# Altium PCB CAN_PDM.PcbDoc
Units mm, origin at the board's own origin, x right, y up, seen from the top; angles counter-clockwise.
Board outline 90 x 100 mm, 4 copper layers (Top Layer, Int1(GND), Int2 (PWR+SIGN), Bottom Layer), stack 1.61 mm thick; 287 components, 204 nets, 885 pads, 0 vias.
Unrouted connection lines stored in the file: 583.
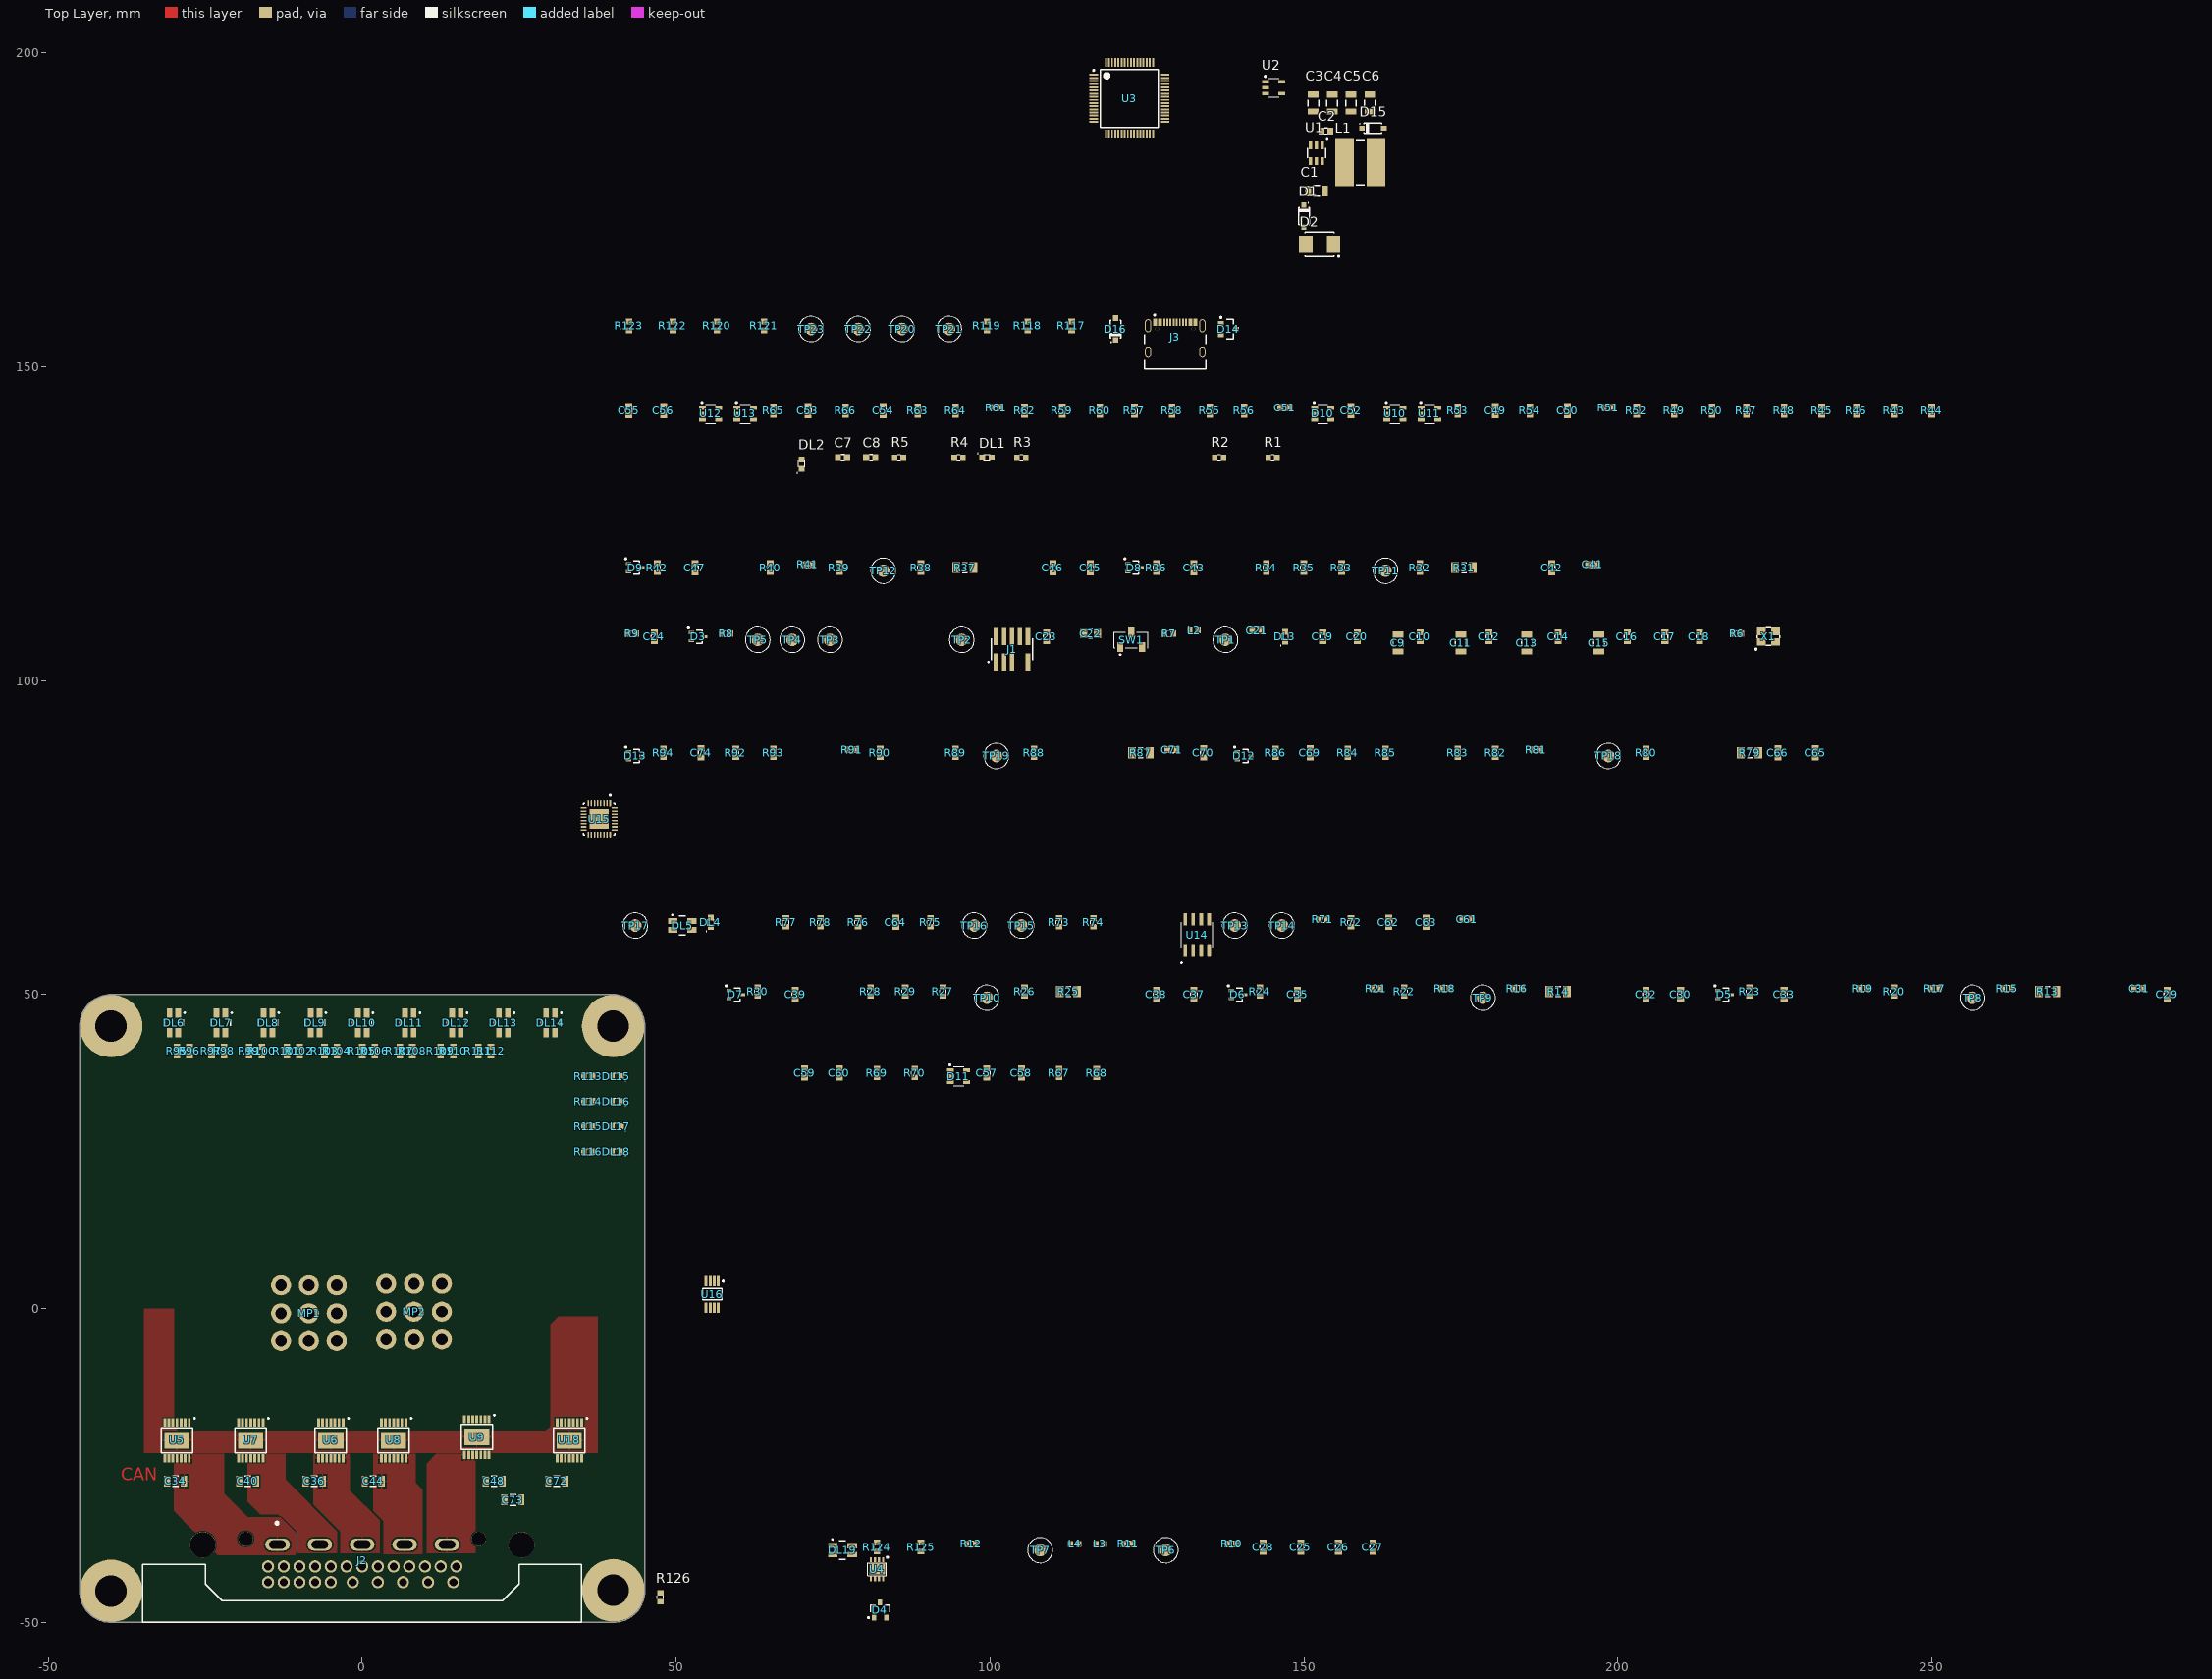
[diagram p0: Top Layer view]
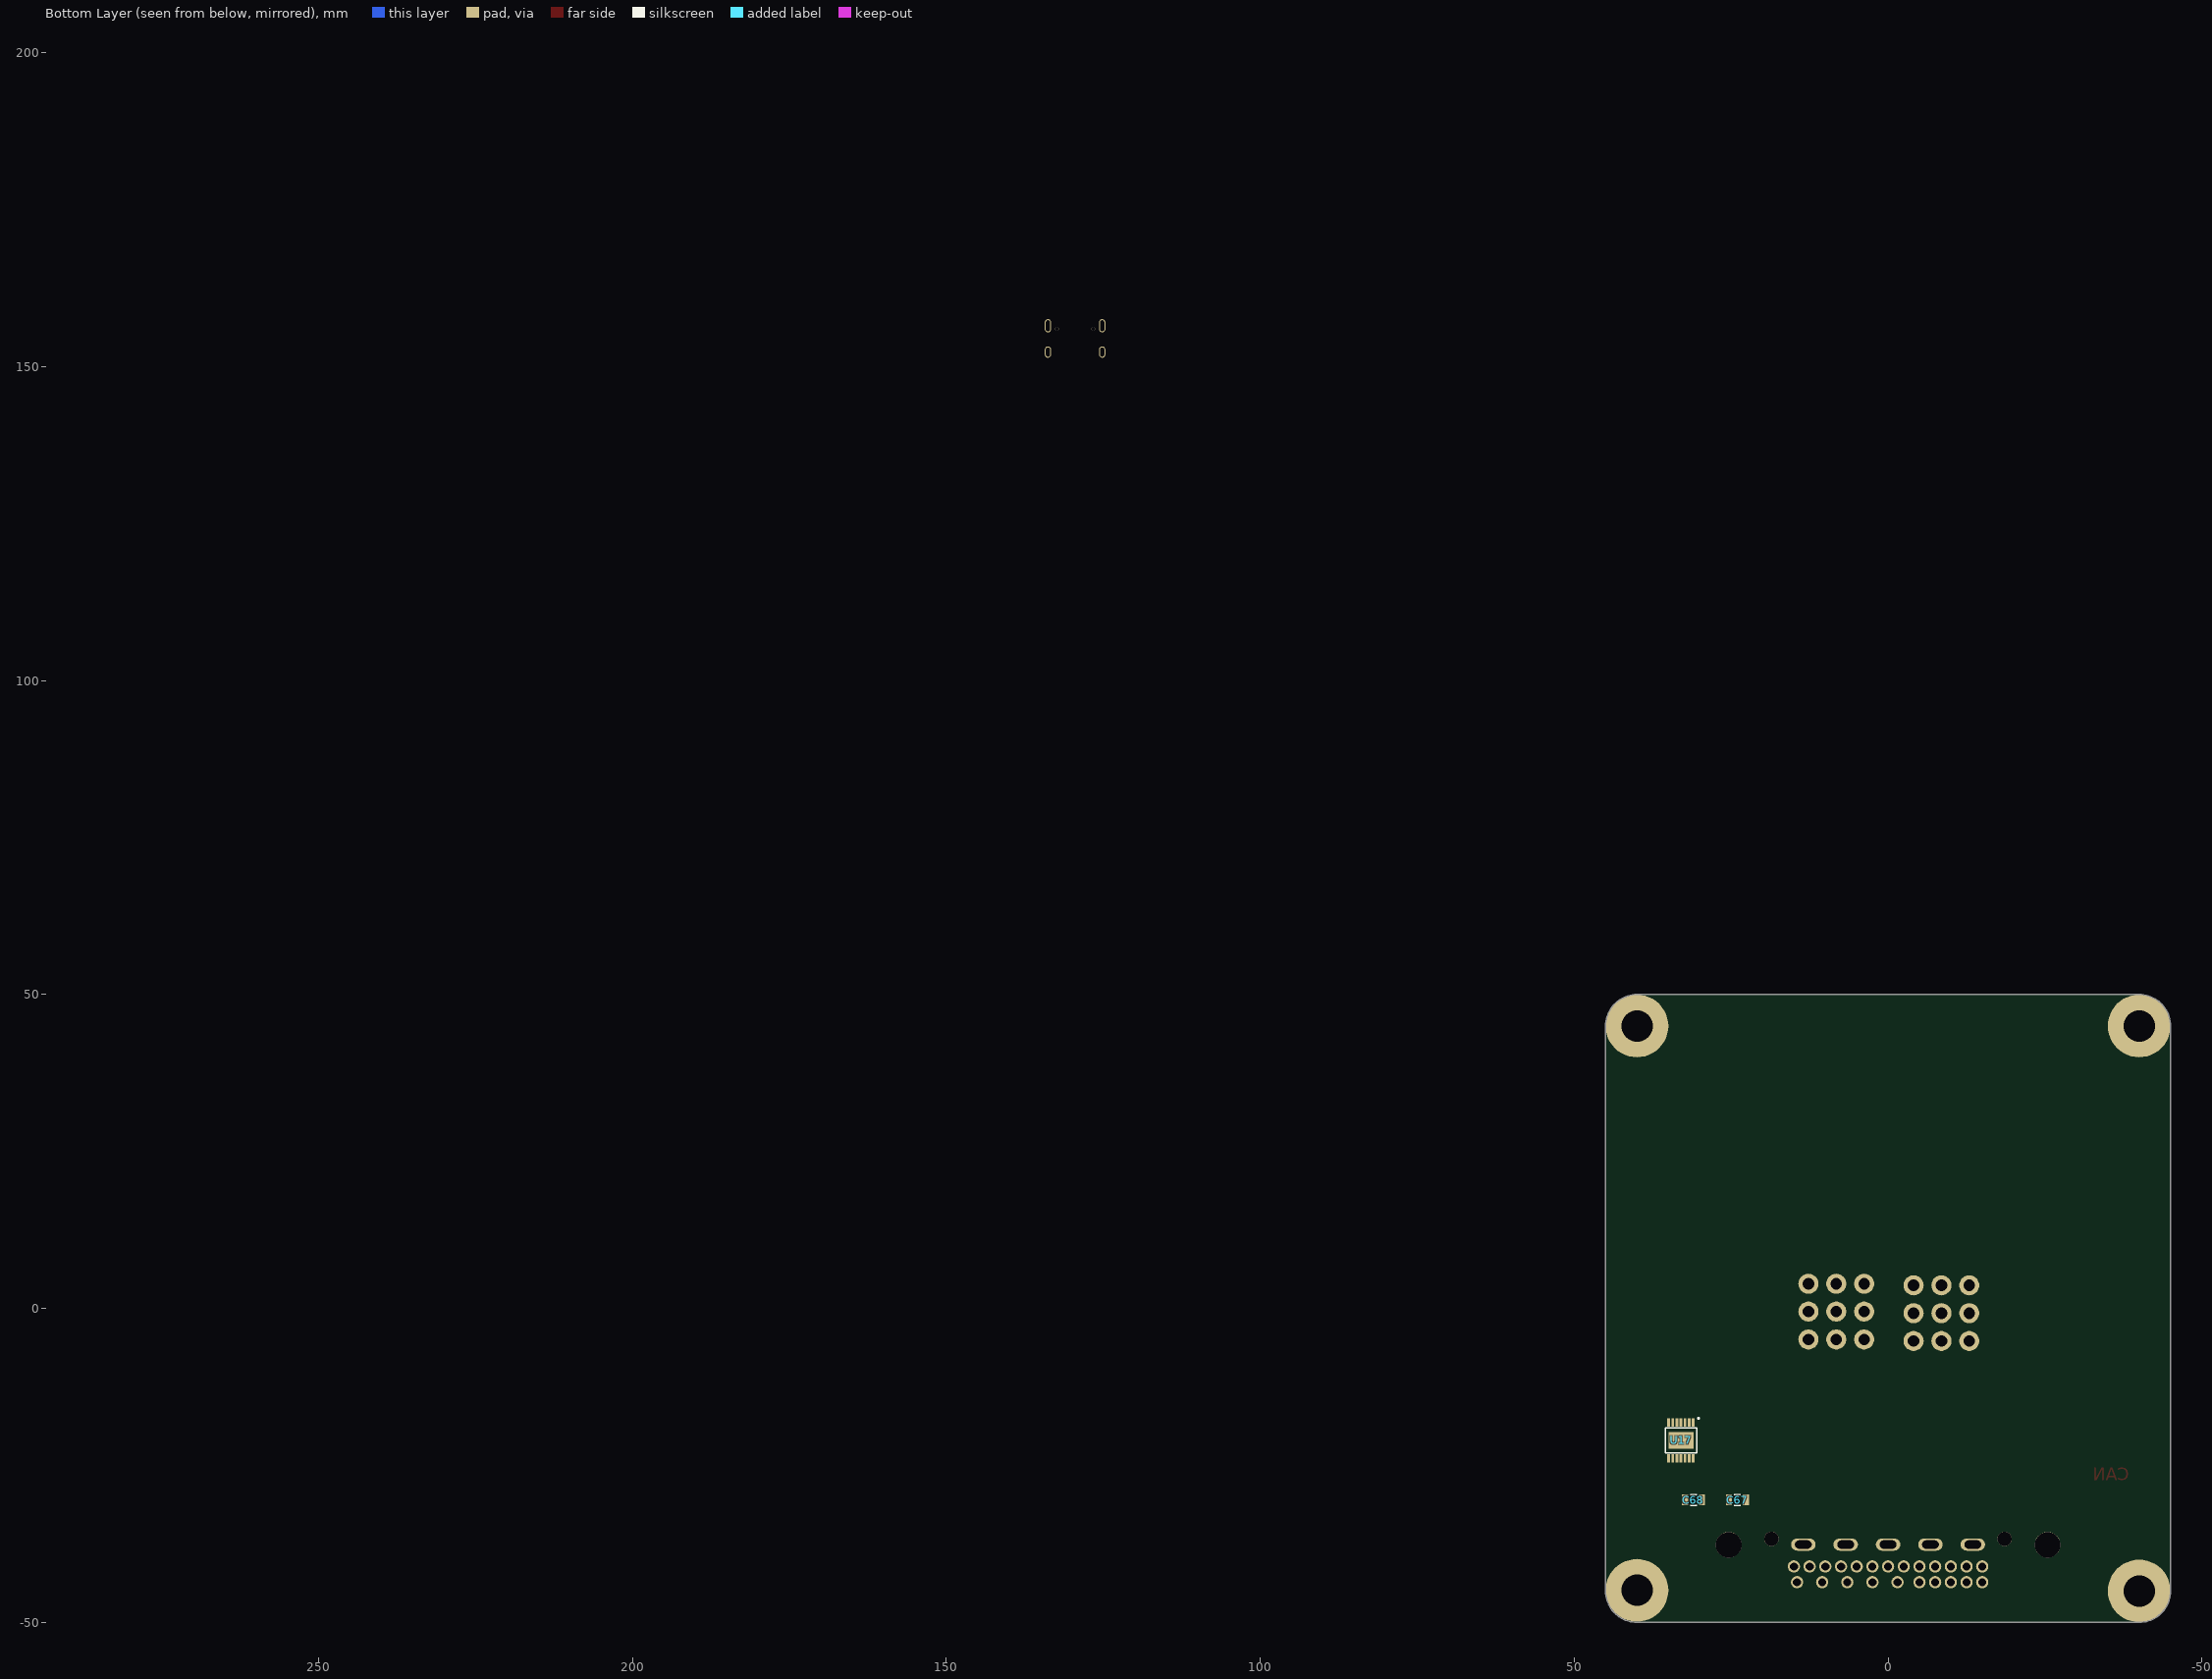
[diagram p1: Bottom Layer view, seen from below]

## Layer stack, top to bottom
Top Solder: solder mask 0.0254, SM-001, Dk 4
Top Layer: signal copper 0.07
Dielectric 1: prepreg 0.1, PP-006, Dk 4.3
Dielectric 2: prepreg 0.1, PP-006, Dk 4.3
Int1(GND): signal copper 0.035
Dielectric 3: core 0.5, Core-035, Dk 4.3
Dielectric 6: core 0.5, Core-035, Dk 4.3
Int2 (PWR+SIGN): signal copper 0.035
Dielectric 7: prepreg 0.1, PP-006, Dk 4.3
Dielectric 8: prepreg 0.1, PP-006, Dk 4.3
Bottom Layer: signal copper 0.07
Bottom Solder: solder mask 0.0254, SM-001, Dk 4

## Board outline
-45,-45 -45,45 cw(c-40,45) -40,50 40,50 cw(c40,45) 45,45 45,-45 cw(c40,-45) 40,-50 -40,-50 cw(c-40,-45)

## Design rules (kind name [scope] priority, off if disabled: settings)
Clearance [All] p1: gap=0.2 ignorepadtopadclearanceinfootprint=FALSE
DiffPairsRouting DIFF_USB [InDifferentialPair('MCU_USBD')] p1: maxlimit=0.127 minlimit=0.127 mostfreqgap=0.127 toplayer_minwidth=0.155 toplayer_maxwidth=0.155 toplayer_prefwidth=0.155 midlayer1_minwidth=0.113 midlayer1_maxwidth=0.113 midlayer1_prefwidth=0.113 midlayer2_minwidth=0.113 midlayer2_maxwidth=0.113 midlayer2_prefwidth=0.113 bottomlayer_minwidth=0.155 bottomlayer_maxwidth=0.155 bottomlayer_prefwidth=0.155 impedanceprofiledriven=TRUE impedanceprofileid={4725E992-7F78-4913-8093-96E97FDBBCEB} impedanceprofilevalue=90.000000 maxuncoupledlength=12.7
DiffPairsRouting DIFF_CAN [InDifferentialPair('CAN')] p2: maxlimit=0.4 minlimit=0.127 mostfreqgap=0.4 toplayer_mingap=0.4 toplayer_minwidth=0.162 toplayer_maxwidth=0.162 toplayer_prefwidth=0.162 midlayer1_maxgap=0.127 midlayer1_prefgap=0.127 midlayer1_minwidth=0.029 midlayer1_maxwidth=0.029 midlayer1_prefwidth=0.029 midlayer2_maxgap=0.127 midlayer2_prefgap=0.127 midlayer2_minwidth=0.029 midlayer2_maxwidth=0.029 midlayer2_prefwidth=0.029 bottomlayer_mingap=0.4 bottomlayer_minwidth=0.162 bottomlayer_maxwidth=0.162 bottomlayer_prefwidth=0.162 impedanceprofiledriven=TRUE impedanceprofileid={24A1E0E4-F791-4F9D-94C0-74FD7069D479} impedanceprofilevalue=120.000000 maxuncoupledlength=12.7
DiffPairsRouting DIFF_CAN_1 [InDifferentialPair('CAN0_IC')] p3: maxlimit=0.4 minlimit=0.127 mostfreqgap=0.4 toplayer_mingap=0.4 toplayer_minwidth=0.162 toplayer_maxwidth=0.162 toplayer_prefwidth=0.162 midlayer1_maxgap=0.127 midlayer1_prefgap=0.127 midlayer1_minwidth=0.029 midlayer1_maxwidth=0.029 midlayer1_prefwidth=0.029 midlayer2_maxgap=0.127 midlayer2_prefgap=0.127 midlayer2_minwidth=0.029 midlayer2_maxwidth=0.029 midlayer2_prefwidth=0.029 bottomlayer_mingap=0.4 bottomlayer_minwidth=0.162 bottomlayer_maxwidth=0.162 bottomlayer_prefwidth=0.162 impedanceprofiledriven=TRUE impedanceprofileid={24A1E0E4-F791-4F9D-94C0-74FD7069D479} impedanceprofilevalue=120.000000 maxuncoupledlength=12.7
Height [All] p1: minheight=0 maxheight=40 prefheight=12.7
PolygonConnect [All] p1: connectstyle=Relief reliefconductorwidth=0.254 reliefentries=4 polygonreliefangle="90 Angle" airgapwidth=0.254
RoutingVias [All] p1: holewidth=0.711 width=1.27 viastyle="Through Hole" minholewidth=0.711 minwidth=1.27 maxholewidth=0.711 maxwidth=1.27
SolderMaskExpansion [All] p1: expansion=0.102 istentingtop=FALSE
SupplyNets "Schematic Supply Nets_6" [InNet('VBUS')] p1: voltage=0.000
SupplyNets "Schematic Supply Nets_5" [InNet('GND')] p2: voltage=0.000
SupplyNets "Schematic Supply Nets_4" [InNet('+12V')] p3: voltage=0.000
SupplyNets "Schematic Supply Nets_3" [InNet('5V')] p4: voltage=0.000
SupplyNets "Schematic Supply Nets_2" [InNet('IGNITION')] p5: voltage=0.000
SupplyNets "Schematic Supply Nets_1" [InNet('3V3')] p6: voltage=0.000
SupplyNets "Schematic Supply Nets" [InNet('+3V3')] p7: voltage=0.000
Width [All] p1: maxlimit=1 minlimit=0.15 preferedwidth=0.3 toplayer_prefwidth=0.2 midlayer1_minwidth=0.2 midlayer2_minwidth=0.2 bottomlayer_prefwidth=0.2 minimp=50.000000 maximp=50.000000 favimp=50.000000
28 further rules are at their usual default settings.

## Classes and differential pairs
component class USB: D14 D16 J3 R117 R118 R119 R120 R121 R122 R123 TP20 TP21 TP22 TP23
component class LED_STATUS_OUTPUTS: DL6 DL7 DL8 DL9 DL10 DL11 DL12 DL13 DL14 R95 R96 R97 R98 R99 R100 R101 R102 R103 R104 R105 R106 R107 R108 R109 R110 R111 R112
component class LED_STATUS_INPUT: DL15 DL16 DL17 DL18 R113 R114 R115 R116
component class SENSOR_INP: C49 C50 C51 C52 C53 C54 C55 C56 D10 R43 R44 R45 R46 R47 R48 R49 R50 R51 R52 R53 R54 R55 R56 R57 R58 R59 R60 R61 R62 R63 R64 R65 R66 U10 U11 U12 U13
component class PWR: C1 C2 C3 C4 C5 C6 C7 C8 D1 D2 D15 DL1 DL2 L1 MP1 MP2 R1 R2 R3 R4 R5 R126 U1 U2
component class MID_CURR_MOS: C41 C42 C43 C44 C45 C46 C47 C48 D8 D9 R31 R32 R33 R34 R35 R36 R37 R38 R39 R40 R41 R42 TP11 TP12 U8 U9
component class MCU: C9 C10 C11 C12 C13 C14 C15 C16 C17 C18 C19 C20 C21 C22 C23 C24 D3 DL3 J1 L2 R6 R7 R8 R9 SW1 TP1 TP2 TP3 TP4 TP5 U3 X1
component class LOW_CURR_MOS: C65 C66 C67 C68 C69 C70 C71 C72 C73 C74 D12 D13 R79 R80 R81 R82 R83 R84 R85 R86 R87 R88 R89 R90 R91 R92 R93 R94 TP18 TP19 U17 U18
component class I2C: C61 C62 C63 C64 DL4 DL5 R71 R72 R73 R74 R75 R76 R77 R78 TP13 TP14 TP15 TP16 TP17 U14 U15 U16
component class HIGH_CURR_MOS: C29 C30 C31 C32 C33 C34 C35 C36 C37 C38 C39 C40 D5 D6 D7 R13 R14 R15 R16 R17 R18 R19 R20 R21 R22 R23 R24 R25 R26 R27 R28 R29 R30 TP8 TP9 TP10 U5 U6 U7
component class DIGITAL_INP: C57 C58 C59 C60 D11 R67 R68 R69 R70
component class CONNECTOR: J2
component class CAN: C25 C26 C27 C28 D4 DL19 L3 L4 R10 R11 R12 R124 R125 TP6 TP7 U4
differential pair MCU_USBD: +MCU_USBD_P -MCU_USBD_N
differential pair CAN: +CAN_P -CAN_N
differential pair CAN0_IC: +CAN0_IC_P -CAN0_IC_N

## Components (designator, comment, footprint, x,y, rotation, side; value= is the part's Value field where it differs from the comment)
C1 "CAP" CAPC3216X16M 152,178 r0 top value=2u2
C2 "CAP" CAPC1608X09M 153.5,187.5 r0 top value=100n
C3 "CAP" CAPC3216X16M 151.5,192 r90 top value=10u
C4 "CAP" CAPC3216X16M 154.5,192 r90 top value=10u
C5 "CAP" CAPC3216X16M 157.5,192 r90 top value=10u
C6 "CAP" CAPC3216X16M 160.5,192 r90 top value=10u
C7 "CAP" CAPC1608X09M 76.5,135.5 r0 top value=1u
C8 "CAP" CAPC1608X09M 81,135.5 r0 top value=1u
C9 "CAP" CAPC3216X16M 165,106 r90 top value=10u
C10 "CAP" CAPC1608X09M 168.5,107 r90 top value=100n
C11 "CAP" CAPC3216X16M 175,106 r90 top value=10u
C12 "CAP" CAPC1608X09M 179.5,107 r90 top value=100n
C13 "CAP" CAPC3216X16M 185.5,106 r90 top value=10u
C14 "CAP" CAPC1608X09M 190.5,107 r90 top value=100n
C15 "CAP" CAPC3216X16M 197,106 r90 top value=10u
C16 "CAP" CAPC1608X09M 201.5,107 r90 top value=100n
C17 "CAP" CAPC1608X09M 207.5,107 r90 top value=100n
C18 "CAP" CAPC1608X09M 212.999,107 r90 top value=1u
C19 "CAP" CAPC1608X09M 153,107 r90 top value=27p
C20 "CAP" CAPC1608X09M 158.5,107 r90 top value=27p
C21 "CAP" CAPC1608X09M 142.5,108 r0 top value=100n
C22 "CAP" CAPC2012X14N 116,107.5 r0 top value=4u7
C23 "CAP" CAPC1608X09M 109,107 r90 top value=100n
C24 "CAP" CAPC1608X09M 46.5,107 r90 top value=100n
C25 "CAP" CAPC1608X09M 149.5,-38 r90 top value=100n
C26 "CAP" CAPC1608X09M 155.5,-38 r90 top value=47n
C27 "CAP" CAPC1608X09M 161,-38 r90 top value=100n
C28 "CAP" CAPC1608X09M 143.5,-38 r90 top value=100n
C29 "CAP" CAPC1608X09M 287.499,50 r90 top value=47n
C30 "CAP" CAPC1608X09M 210,50 r90 top value=47n
C31 "CAP" CAPC1608X09M 282.999,51 r0 top value=100n
C32 "CAP" CAPC1608X09M 204.5,50 r90 top value=100n
C33 "CAP" CAPC1608X09M 226.5,50 r90 top value=220p
C34 "CAP" CAPC3216X16M -29.75,-27.5 r180 top value=10n
C35 "CAP" CAPC1608X09M 149,50 r90 top value=220p
C36 "CAP" CAPC3216X16M -7.65,-27.5 r180 top value=10n
C37 "CAP" CAPC1608X09M 132.5,50 r90 top value=47n
C38 "CAP" CAPC1608X09M 126.5,50 r90 top value=100n
C39 "CAP" CAPC1608X09M 69,50 r90 top value=220p
C40 "CAP" CAPC3216X16M -18.25,-27.5 r180 top value=10n
C41 "CAP" CAPC1608X09M 196,118.5 r0 top value=47n
C42 "CAP" CAPC1608X09M 189.5,118 r90 top value=100n
C43 "CAP" CAPC1608X09M 132.5,118 r90 top value=220p
C44 "CAP" CAPC3216X16M 1.75,-27.5 r180 top value=10n
C45 "CAP" CAPC1608X09M 116,118 r90 top value=47n
C46 "CAP" CAPC1608X09M 110,118 r90 top value=100n
C47 "CAP" CAPC1608X09M 53,118 r90 top value=220p
C48 "CAP" CAPC3216X16M 21,-27.5 r0 top value=10n
C49 "CAP" CAPC1608X09M 180.5,143 r90 top
C50 "CAP" CAPC1608X09M 192,143 r90 top
C51 "CAP" CAPC1608X09M 147,143.5 r0 top value=100n
C52 "CAP" CAPC1608X09M 157.5,143 r90 top value=100n
C53 "CAP" CAPC1608X09M 71,143 r90 top
C54 "CAP" CAPC1608X09M 83,143 r90 top
C55 "CAP" CAPC1608X09M 42.5,143 r90 top value=100n
C56 "CAP" CAPC1608X09M 48,143 r90 top value=100n
C57 "CAP" CAPC1608X09M 99.5,37.5 r90 top value=10n
C58 "CAP" CAPC1608X09M 105,37.5 r90 top value=10n
C59 "CAP" CAPC1608X09M 70.5,37.5 r90 top value=10n
C60 "CAP" CAPC1608X09M 76,37.5 r90 top value=10n
C61 "CAP" CAPC1608X09M 176,62 r0 top value=100n
C62 "CAP" CAPC1608X09M 163.5,61.5 r90 top value=100n
C63 "CAP" CAPC1608X09M 169.5,61.5 r90 top value=1u
C64 "CAP" CAPC1608X09M 85,61.5 r90 top value=1u
C65 "CAP" CAPC1608X09M 231.499,88.5 r90 top value=47n
C66 "CAP" CAPC1608X09M 225.499,88.5 r90 top value=100n
C67 "CAP" CAPC3216X16M 24,-30.5 r180 bottom value=10n
C68 "CAP" CAPC3216X16M 31,-30.5 r0 bottom value=10n
C69 "CAP" CAPC1608X09M 151,88.5 r90 top value=220p
C70 "CAP" CAPC1608X09M 134,88.5 r90 top value=47n
C71 "CAP" CAPC1608X09M 129,89 r0 top value=100n
C72 "CAP" CAPC3216X16M 31,-27.5 r0 top value=10n
C73 "CAP" CAPC3216X16M 24,-30.5 r180 top value=10n
C74 "CAP" CAPC1608X09M 54,88.5 r90 top value=220p
D1 "Diode_Schottky" "SODFL360X130-2M -AC" 150,174 r270 top value=PMEG4010EGWX
D2 "Diode" ONSC-SMB-2 152.5,169.5 r180 top value=SZ1SMB20CAT3G
D3 "Diode_Schottky" "SOT65P210X100-3N - AC" 53.5,107 r0 top value=5V
D4 "ESD_Diode" SOT95P240X120-3N 82.5,-48.025 r90 top value=SM712-02HTG
D5 "Diode_Schottky" "SOT65P210X100-3N - AC" 217,50 r0 top value=5V
D6 "Diode_Schottky" "SOT65P210X100-3N - AC" 139.5,50 r0 top value=5V
D7 "Diode_Schottky" "SOT65P210X100-3N - AC" 59.5,50 r0 top value=5V
D8 "Diode_Schottky" "SOT65P210X100-3N - AC" 123,118 r0 top value=5V
D9 "Diode_Schottky" "SOT65P210X100-3N - AC" 43.5,118 r0 top value=5V
D10 "Diode TVS" SOT95P280X145-5N 153,142.5 r0 top value=SP0504BAHTG
D11 "Diode TVS" SOT95P280X145-5N 95,37 r0 top value=SP0504BAHTG
D12 "Diode_Schottky" "SOT65P210X100-3N - AC" 140.5,88 r0 top value=5V
D13 "Diode_Schottky" "SOT65P210X100-3N - AC" 43.5,88 r0 top value=5V
D14 "ESD_Diode" SOT95P240X120-3N 138,156 r0 top value=SM712-02HTG
D15 "Diode_Schottky" "SODFL360X130-2M -AC" 161,188 r0 top value=PMEG4010EGWX
D16 "Diode_Schottky" "SODFL360X130-2M -AC" 120,156 r90 top value=PMEG4010EGWX
DL1 "Led_Green" LED0603 99.5,135.5 r0 top value=150060VS75000
DL2 "Led_Green" LED0603 70,134.5 r90 top value=150060VS75000
DL3 "Led_Green" LED0603 147,107 r90 top value=150060BS75000
DL4 "LED_Red" LED0603 55.5,61.5 r90 top value=Value
DL5 "LED_Yellow_Blue" WURTH-SBTW_3528#1 1320.997,1330.997 r0 top value=150141YB73100
DL6 "LED_Red_Green" WURTH-SBTW_3528#2 -30,45.5 r270 top value=150141RV73100
DL7 "LED_Red_Green" WURTH-SBTW_3528#2 -22.5,45.5 r270 top value=150141RV73100
DL8 "LED_Red_Green" WURTH-SBTW_3528#2 -15,45.5 r270 top value=150141RV73100
DL9 "LED_Red_Green" WURTH-SBTW_3528#2 -7.5,45.5 r270 top value=150141RV73100
DL10 "LED_Red_Green" WURTH-SBTW_3528#2 0,45.5 r270 top value=150141RV73100
DL11 "LED_Red_Green" WURTH-SBTW_3528#2 7.5,45.5 r270 top value=150141RV73100
DL12 "LED_Red_Green" WURTH-SBTW_3528#2 15,45.5 r270 top value=150141RV73100
DL13 "LED_Red_Green" WURTH-SBTW_3528#2 22.5,45.5 r270 top value=150141RV73100
DL14 "LED_Red_Green" WURTH-SBTW_3528#2 30,45.5 r270 top value=150141RV73100
DL15 "Led_Green" LED0603 40.5,37 r180 top value=150060BS75000
DL16 "Led_Green" LED0603 40.5,33 r180 top value=150060BS75000
DL17 "Led_Green" LED0603 40.5,29 r180 top value=150060BS75000
DL18 "Led_Green" LED0603 40.5,25 r180 top value=150060BS75000
DL19 "LED_Yellow_Blue" WURTH-SBTW_3528#1 1346.497,1231.497 r0 top value=150141YB73100
J1 "Connector" SAMTEC_FTSH-105-X-X-DV-007-P-X 103.5,105 r0 top value=FTSH-105-01-L-DV-007-K
J2 "Connector" MOLEX_0477450100 0,-40.15 r0 top locked value=477450100
J3 "USB4105-GF-A" GCT-USB4105-GF-A 129.5,153.5 r0 top
L1 "IND" BOURNS_SDE0805A 159,182.5 r0 top value=18u
L2 "IND" INDC1608X09N 132.5,108 r0 top
L3 "IND" INDC1608X09N 117.5,-37.5 r0 top value=BLM18HB331SN1D
L4 "IND" INDC1608X09N 113.5,-37.5 r0 top value=BLM18HB331SN1D
MP1 "Connector" WURTH_74651195 -8.5,-0.75 r0 top value=74651195R
MP2 "Connector" WURTH_74651195 8.25,-0.5 r0 top value=74651195R
R1 "Res" RESC1608X06M 145,135.5 r0 top value=88K7
R2 "Res" RESC1608X06M 136.5,135.5 r0 top value=1K3
R3 "Res" RESC1608X06M 105,135.5 r0 top value=10K
R4 "Res" RESC1608X06M 95,135.5 r0 top value=22K1
R5 "Res" RESC1608X06M 85.5,135.5 r0 top value=560R
R6 "Res" RESC1608X06M 218.999,107.5 r0 top value=560R
R7 "Res" RESC1608X06M 128.5,107.5 r0 top value=10K
R8 "Res" RESC1608X06M 58,107.5 r0 top value=51K
R9 "Res" RESC1608X06M 43,107.5 r0 top value=7K5
R10 "Res" RESC1608X06M 138.5,-37.5 r0 top value=120R
R11 "Res" RESC1608X06M 122,-37.5 r0 top value=1K
R12 "Res" RESC1608X06M 97,-37.5 r0 top value=10K
R13 "Res" RESC3216X07N 268.499,50.5 r0 top value=47R
R14 "Res" RESC3216X07N 190.5,50.5 r0 top value=47R
R15 "Res" RESC1608X06M 261.999,51 r0 top value=4K7
R16 "Res" RESC1608X06M 184,51 r0 top value=4K7
R17 "Res" RESC1608X06M 250.499,51 r0 top value=4K7
R18 "Res" RESC1608X06M 172.5,51 r0 top value=4K7
R19 "Res" RESC1608X06M 238.999,51 r0 top value=4K7
R20 "Res" RESC1608X06M 243.999,50.5 r90 top value=4K7
R21 "Res" RESC1608X06M 161.5,51 r0 top value=4K7
R22 "Res" RESC1608X06M 166,50.5 r90 top value=4K7
R23 "Res" RESC1608X06M 221,50.5 r90 top value=1K2
R24 "Res" RESC1608X06M 143,50.5 r90 top value=1K2
R25 "Res" RESC3216X07N 112.5,50.5 r0 top value=47R
R26 "Res" RESC1608X06M 105.5,50.5 r90 top value=4K7
R27 "Res" RESC1608X06M 92.5,50.5 r90 top value=4K7
R28 "Res" RESC1608X06M 81,50.5 r90 top value=4K7
R29 "Res" RESC1608X06M 86.5,50.5 r90 top value=4K7
R30 "Res" RESC1608X06M 63,50.5 r90 top value=1K2
R31 "Res" RESC3216X07N 175.5,118 r0 top value=47R
R32 "Res" RESC1608X06M 168.5,118 r90 top value=4K7
R33 "Res" RESC1608X06M 156,118 r90 top value=4K7
R34 "Res" RESC1608X06M 144,118 r90 top value=4K7
R35 "Res" RESC1608X06M 150,118 r90 top value=4K7
R36 "Res" RESC1608X06M 126.5,118 r90 top value=1K2
R37 "Res" RESC3216X07N 96,118 r0 top value=47R
R38 "Res" RESC1608X06M 89,118 r90 top value=4K7
R39 "Res" RESC1608X06M 76,118 r90 top value=4K7
R40 "Res" RESC1608X06M 65,118 r90 top value=4K7
R41 "Res" RESC1608X06M 71,118.5 r0 top value=4K7
R42 "Res" RESC1608X06M 47,118 r90 top value=1K2
R43 "Res" RESC1608X06M 243.999,143 r90 top value=10K
R44 "Res" RESC1608X06M 249.999,143 r90 top value=10K
R45 "Res" RESC1608X06M 232.499,143 r90 top value=0R
R46 "Res" RESC1608X06M 237.999,143 r90 top value=0R
R47 "Res" RESC1608X06M 220.499,143 r90 top value=15K
R48 "Res" RESC1608X06M 226.499,143 r90 top value=15K
R49 "Res" RESC1608X06M 209,143 r90 top value=0R
R50 "Res" RESC1608X06M 214.999,143 r90 top value=0R
R51 "Res" RESC1608X06M 198.5,143.5 r0 top value=15K
R52 "Res" RESC1608X06M 203,143 r90 top value=15K
R53 "Res" RESC1608X06M 174.5,143 r90 top value=10K
R54 "Res" RESC1608X06M 186,143 r90 top value=10K
R55 "Res" RESC1608X06M 135,143 r90 top value=10K
R56 "Res" RESC1608X06M 140.5,143 r90 top value=10K
R57 "Res" RESC1608X06M 123,143 r90 top value=0R
R58 "Res" RESC1608X06M 129,143 r90 top value=0R
R59 "Res" RESC1608X06M 111.5,143 r90 top value=15K
R60 "Res" RESC1608X06M 117.5,143 r90 top value=15K
R61 "Res" RESC1608X06M 101,143.5 r0 top value=0R
R62 "Res" RESC1608X06M 105.5,143 r90 top value=0R
R63 "Res" RESC1608X06M 88.5,143 r90 top value=15K
R64 "Res" RESC1608X06M 94.5,143 r90 top value=15K
R65 "Res" RESC1608X06M 65.5,143 r90 top value=10K
R66 "Res" RESC1608X06M 77,143 r90 top value=10K
R67 "Res" RESC1608X06M 111,37.5 r90 top value=4K7
R68 "Res" RESC1608X06M 117,37.5 r90 top value=4K7
R69 "Res" RESC1608X06M 82,37.5 r90 top value=4K7
R70 "Res" RESC1608X06M 88,37.5 r90 top value=4K7
R71 "Res" RESC1608X06M 153,62 r0 top value=4K7
R72 "Res" RESC1608X06M 157.5,61.5 r90 top value=4K7
R73 "Res" RESC1608X06M 111,61.5 r90 top value=10K
R74 "Res" RESC1608X06M 116.5,61.5 r90 top value=10K
R75 "Res" RESC1608X06M 90.5,61.5 r90 top value=0R
R76 "Res" RESC1608X06M 79,61.5 r90 top value=560R
R77 "Res" RESC1608X06M 67.5,61.5 r90 top value=1K3
R78 "Res" RESC1608X06M 73,61.5 r90 top value=1K3
R79 "Res" RESC3216X07N 220.999,88.5 r0 top value=47R
R80 "Res" RESC1608X06M 204.5,88.5 r90 top value=4K7
R81 "Res" RESC1608X06M 187,89 r0 top value=4K7
R82 "Res" RESC1608X06M 180.5,88.5 r90 top value=4K7
R83 "Res" RESC1608X06M 174.5,88.5 r90 top value=4K7
R84 "Res" RESC1608X06M 157,88.5 r90 top value=4K7
R85 "Res" RESC1608X06M 163,88.5 r90 top value=4K7
R86 "Res" RESC1608X06M 145.5,88.5 r90 top value=1K2
R87 "Res" RESC3216X07N 124,88.5 r0 top value=47R
R88 "Res" RESC1608X06M 107,88.5 r90 top value=4K7
R89 "Res" RESC1608X06M 94.5,88.5 r90 top value=4K7
R90 "Res" RESC1608X06M 82.5,88.5 r90 top value=4K7
R91 "Res" RESC1608X06M 78,89 r0 top value=4K7
R92 "Res" RESC1608X06M 59.5,88.5 r90 top value=4K7
R93 "Res" RESC1608X06M 65.5,88.5 r90 top value=4K7
R94 "Res" RESC1608X06M 48,88.5 r90 top value=1K2
R95 "Res" RESC1608X06M -29.5,41 r270 top value=1K3
R96 "Res" RESC1608X06M -27.5,41 r270 top value=1K3
R97 "Res" RESC1608X06M -24,41 r270 top value=1K3
R98 "Res" RESC1608X06M -22,41 r270 top value=1K3
R99 "Res" RESC1608X06M -18,41 r270 top value=1K3
R100 "Res" RESC1608X06M -16,41 r270 top value=1K3
R101 "Res" RESC1608X06M -12,41 r270 top value=1K3
R102 "Res" RESC1608X06M -10,41 r270 top value=1K3
R103 "Res" RESC1608X06M -6,41 r270 top value=1K3
R104 "Res" RESC1608X06M -4,41 r270 top value=1K3
R105 "Res" RESC1608X06M 0,41 r270 top value=1K3
R106 "Res" RESC1608X06M 2,41 r270 top value=1K3
R107 "Res" RESC1608X06M 6,41 r270 top value=1K3
R108 "Res" RESC1608X06M 8,41 r270 top value=1K3
R109 "Res" RESC1608X06M 12.5,41 r270 top value=1K3
R110 "Res" RESC1608X06M 14.5,41 r270 top value=1K3
R111 "Res" RESC1608X06M 18.5,41 r270 top value=1K3
R112 "Res" RESC1608X06M 20.5,41 r270 top value=1K3
R113 "Res" RESC1608X06M 36,37 r0 top value=560R
R114 "Res" RESC1608X06M 36,33 r0 top value=560R
R115 "Res" RESC1608X06M 36,29 r0 top value=560R
R116 "Res" RESC1608X06M 36,25 r180 top value=560R
R117 "CRCW06030000Z0EAC" RESC1608X06M 113,156.5 r90 top value=0R
R118 "CRCW06030000Z0EAC" RESC1608X06M 106,156.5 r90 top value=0R
R119 "" RESC1608X06M 99.5,156.5 r90 top value=1K5
R120 "Resistor" RESC1608X06M 56.5,156.5 r90 top value=5K1
R121 "Resistor" RESC1608X06M 64,156.5 r90 top value=5K1
R122 "" RESC1608X06M 49.5,156.5 r90 top value=62K
R123 "" RESC1608X06M 42.5,156.5 r90 top value=120K
R124 "Res" RESC1608X06M 82,-38 r90 top value=1K3
R125 "Res" RESC1608X06M 89,-38 r90 top value=1K3
R126 "Res" RESC1608X06M 47.5,-46 r90 top value=10K
SW1 "Switch SPDT" SW_CJS-1200TA 122.5,106.5 r0 top value=CJS-1200TA
TP1 "TP" TP_c200 137.5,106.5 r0 top
TP2 "TP" TP_c200 95.5,106.5 r0 top
TP3 "TP" TP_c200 74.5,106.5 r0 top
TP4 "TP" TP_c200 68.5,106.5 r0 top
TP5 "TP" TP_c200 63,106.5 r0 top
TP6 "TP" TP_c200 128,-38.5 r0 top
TP7 "TP" TP_c200 108,-38.5 r0 top
TP8 "TP" TP_c200 256.499,49.5 r0 top
TP9 "TP" TP_c200 178.5,49.5 r0 top
TP10 "TP" TP_c200 99.5,49.5 r0 top
TP11 "TP" TP_c200 163,117.5 r0 top
TP12 "TP" TP_c200 83,117.5 r0 top
TP13 "TP" TP_c200 139,61 r0 top
TP14 "TP" TP_c200 146.5,61 r0 top
TP15 "TP" TP_c200 105,61 r0 top
TP16 "TP" TP_c200 97.5,61 r0 top
TP17 "TP" TP_c200 43.5,61 r0 top
TP18 "TP" TP_c200 198.5,88 r0 top
TP19 "TP" TP_c200 101,88 r0 top
TP20 "Test_Point" TP_c200 86,156 r0 top
TP21 "Test_Point" TP_c200 93.5,156 r0 top
TP22 "Test_Point" TP_c200 79,156 r0 top
TP23 "Test_Point" TP_c200 71.5,156 r0 top
U1 "DC DC" SOT95P280X145-6N 152,184 r270 top value=LV3842XDBVR
U2 "TLV75530PDBVR" SOT95P280X145-5N 145.2,194.45 r0 top
U3 "STM32F446RET6" STM-LQFP64_M 122.2,192.75 r0 top
U4 "TJA1051TK/3,118" SON65P300X300X100-9N-D 82,-41.525 r270 top
U5 "BTS7002-1EPP" SOP65P600X115-15 -29.5,-21 r270 top value=BTS70021EPPXUMA1
U6 "BTS7002-1EPP" SOP65P600X115-15 -5,-21 r270 top value=BTS70021EPPXUMA1
U7 "BTS7002-1EPP" SOP65P600X115-15 -17.75,-21 r270 top value=BTS70021EPPXUMA1
U8 "BTS70041EPZXUMA1" SOP65P600X115-15 5,-21 r270 top
U9 "BTS70041EPZXUMA1" SOP65P600X115-15 18.25,-20.5 r270 top
U10 "TLV900" SOT95P280X145-5N 164.5,142.5 r0 top value=TLV9001IDBVR
U11 "TLV900" SOT95P280X145-5N 170,142.5 r0 top value=TLV9001IDBVR
U12 "TLV900" SOT95P280X145-5N 55.5,142.5 r0 top value=TLV9001IDBVR
U13 "TLV900" SOT95P280X145-5N 61,142.5 r0 top value=TLV9001IDBVR
U14 "MB85RC04V" SOIC127P600X175-8N 133,59.5 r90 top
U15 "PCAL6524HEAZ" FP-SOT1426-1-IPC_A 37.75,77.976 r270 top
U16 "MCP9808-E/MS" MCHP-MSOP-MS8_N 55.75,2.25 r270 top
U17 "BTS70082EPZXUMA1" SOP65P600X115-15 33,-21 r270 bottom
U18 "BTS70802EPAXUMA1" SOP65P600X115-15 33,-21 r270 top
X1 "ABM8AIG-8.000MHZ-1Z-T" ABM8G_abracon 223.999,107 r0 top

## Footprints (in the part's own frame and the unit in brackets; to place one, negate y for a bottom-side part, rotate by r counter-clockwise, add the part's x,y. Pads: shape width x height; smd on the part's side, far side on the other; paste and mask are expansions set on the pad)
ABM8G_abracon [mm] "SMD Plastic Package Type  Body (2.5 x 3.2) Heigh 1mm"
  rect 1.4x1.2 smd mask+0.05: 1(-1.1,-0.85) 2(1.1,-0.85) 3(1.1,0.85) 4(-1.1,0.85)
  silkscreen extent -2.1,-2.1 1.8,1.4, body extent -1.65,-1.3 1.65,1.3, height 1
BOURNS_SDE0805A [mm]
  rect 3x7.5 smd: 1(-2.5,0) 2(2.5,0)
  silkscreen extent -0.68,-3.5 0.68,3.5, body extent -3.83,-3.5 3.83,3.5, height 5
CAPC1608X09M [mm] "Chip Capacitor, 2-Leads, Body 1,60x0,80mm, IPC Low Density"
  rect 0.95x1.1 smd: 1(-0.725,0) 2(0.725,0)
  silkscreen extent -0.2,-0.5 0.3,0.5, body extent -0.87,-0.48 0.87,0.48, height 0.92
CAPC2012X14N [mm] "Chip Capacitor, 2-Leads, Body 2,00x1,25mm, IPC Medium Density"
  rect 1.15x1.45 smd: 1(-1.1,0) 2(1.1,0)
  silkscreen extent -0.3,-0.73 0.3,0.73, body extent -1.1,-0.72 1.1,0.72, height 1.45
CAPC3216X16M [mm] "Chip Capacitor, 2-Leads, Body 3,20x1,60mm, IPC Low Density"
  rect 1x1.7 smd: 1(-1.35,0) 2(1.35,0)
  silkscreen extent -0.5,-0.85 0.5,0.85, body extent -1.7,-0.9 1.7,0.9, height 1.6
FP-SOT1426-1-IPC_A [mm]
  rect 0.961x0.239 smd paste+0 mask+0: 1(-2.476,1.75)
  rrect100% 0.961x0.239 smd paste+0 mask+0: 2(-2.476,1.25) 3(-2.476,0.75) 4(-2.476,0.25) 5(-2.476,-0.25) 6(-2.476,-0.75) 7(-2.476,-1.25) 8(-2.476,-1.75) 17(2.476,-1.75) 18(2.476,-1.25) 19(2.476,-0.75) 20(2.476,-0.25) 21(2.476,0.25) 22(2.476,0.75) 23(2.476,1.25) 24(2.476,1.75)
  rrect100% 0.239x0.961 smd paste+0 mask+0: 9(-1.75,-2.476) 10(-1.25,-2.476) 11(-0.75,-2.476) 12(-0.25,-2.476) 13(0.25,-2.476) 14(0.75,-2.476) 15(1.25,-2.476) 16(1.75,-2.476) 25(1.75,2.476) 26(1.25,2.476) 27(0.75,2.476) 28(0.25,2.476) 29(-0.25,2.476) 30(-0.75,2.476) 31(-1.25,2.476) 32(-1.75,2.476)
  rect 3.1x3.1 smd paste-1000 mask+0: 33(0,0)
  silkscreen extent -3.88,-2.5 2.5,2.5, body extent -3.46,-3.46 3.46,3.46, height 0.25
GCT-USB4105-GF-A [mm]
  rrect100% 1x2.1 hole 1.7 slot 0.6 at 0 deg paste-2539.97 mask+0: 1(-4.32,3.015) 2(4.32,3.015)
  rrect100% 1x1.8 hole 1.4 slot 0.6 at 0 deg paste-2539.97 mask+0: 3(-4.32,-1.165) 4(4.32,-1.165)
  rect 0.6x1.15 smd paste+0 mask+0: A1-B12(-3.2,3.59) A4-B9(-2.4,3.59) B1-A12(3.2,3.59) B4-A9(2.4,3.59)
  rect 0.3x1.15 smd paste+0 mask+0: A5(-1.25,3.59) A6(-0.25,3.59) A7(0.25,3.59) A8(1.25,3.59) B5(1.75,3.59) B6(0.75,3.59) B7(-0.75,3.59) B8(-1.75,3.59)
  round 0.65 hole 0.65 unplated paste-2539.97 mask+0: ""(-2.89,2.515) ""(2.89,2.515)
  silkscreen extent -4.86,-3.84 4.86,4.84, body extent -4.96,-3.94 4.96,4.27, height 0.25
INDC1608X09N [mm] "L 0603"
  rect 0.87x0.98 smd: 1(-0.665,0) 2(0.665,0)
  body extent -0.87,-0.48 0.87,0.47, height 0.95
LED0603 [mm] "Chip Diode, 2-Leads, Body 0603"
  rect 0.95x0.95 smd: A(0.75,0) C(-0.75,0)
  silkscreen extent -1.49,-0.5 0.5,0.74, body extent -0.81,-0.4 0.81,0.4, height 1.11
MCHP-MSOP-MS8_N [mm] "SOP, 8-Leads, Body 3x3mm, Pitch 0.65mm, IPC Medium Density"
  rect 1.6x0.45 smd: 1(-2.1,0.975) 2(-2.1,0.325) 3(-2.1,-0.325) 4(-2.1,-0.975) 5(2.1,-0.975) 6(2.1,-0.325) 7(2.1,0.325) 8(2.1,0.975)
  silkscreen extent -2.22,-1.5 0.9,1.88, body extent -1.5,-1.5 1.5,1.5, height 1.1
MOLEX_0477450100 [mm]
  oval 3.9x1.95 hole 1.3 slot 2.6 at 0 deg: 1(-13.5,2.55) 2(-6.75,2.55) 3(0,2.55) 4(6.75,2.55) 5(13.5,2.55)
  round 1.95 hole 1.3: 6(-15,-0.95) 7(-12.5,-0.95) 8(-10,-0.95) 9(-7.5,-0.95) 10(-5,-0.95) 11(-2.5,-0.95) 12(0,-0.95) 13(2.5,-0.95) 14(5,-0.95) 15(7.5,-0.95) 16(10,-0.95) 17(12.5,-0.95) 18(15,-0.95) 19(-15,-3.45) 20(-12.5,-3.45) 21(-10,-3.45) 22(-7.5,-3.45) 23(-5,-3.45) 24(-1.505,-3.45) 25(2.495,-3.45) 26(6.495,-3.45) 27(10.495,-3.45) 28(14.495,-3.45)
  round 4.1 hole 4.1 unplated: ""(-25.4,2.5) ""(25.4,2.5)
  round 2.3 hole 2.3 unplated: ""(-18.575,3.45) ""(18.575,3.45)
  silkscreen extent -34.95,-9.85 34.95,6.15, body extent -34.77,-41.72 35.14,4.48, height 28.43
ONSC-SMB-2 [mm] "SOJ, 2-Leads, Body 4.57x3.81mm"
  rect 2.159x2.743 smd: 1(-2.21,0) 2(2.21,0)
  silkscreen extent -3.16,-1.95 2.3,2.05, body extent -2.29,-1.91 2.28,1.91, height 2.52
RESC1608X06M [mm] "Chip Resistor, 2-Leads, Body 1,60x0,82mm, IPC Low Density"
  rect 0.9x1.05 smd: 1(-0.7,0) 2(0.7,0)
  silkscreen extent -0.25,-0.5 0.25,0.5, body extent -0.85,-0.47 0.85,0.48, height 0.55
RESC3216X07N [mm] "1206"
  rect 1.25x1.75 smd: 1(-1.4,0) 2(1.4,0)
  silkscreen extent -0.4,-0.77 0.4,0.77, body extent -1.6,-0.8 1.6,0.8, height 1.31
SAMTEC_FTSH-105-X-X-DV-007-P-X [mm]
  rect 0.74x2.79 smd: 1(-2.54,-2.035) 2(-2.54,2.035) 3(-1.27,-2.035) 4(-1.27,2.035) 5(0,-2.035) 6(0,2.035) 8(1.27,2.035) 9(2.54,-2.035) 10(2.54,2.035)
  silkscreen extent -3.85,-2.13 3.26,1.72, body extent -3.17,-2.92 3.17,2.92, height 6.11
"SODFL360X130-2M -AC" [mm] "SODFL, 2-Leads, Body 1,60x3,60mm, IPC Low Density"
  rect 0.9x0.8 smd: A(1.75,0) C(-1.75,0)
  silkscreen extent -2.15,-0.85 1.4,0.85, body extent -1.8,-0.8 1.8,0.8
SOIC127P600X175-8N [mm]
  rrect25% 1.97x0.59 smd: 1(-2.475,1.905) 2(-2.475,0.635) 3(-2.475,-0.635) 4(-2.475,-1.905) 5(2.475,-1.905) 6(2.475,-0.635) 7(2.475,0.635) 8(2.475,1.905)
  silkscreen extent -4.54,-2.52 2,2.59, body extent -3,-2.45 3,2.45, height 1.75
SON65P300X300X100-9N-D [mm]
  rect 0.8x0.35 smd: 1(-1.5,0.975) 2(-1.5,0.325) 3(-1.5,-0.325) 4(-1.5,-0.975) 5(1.5,-0.975) 6(1.5,-0.325) 7(1.5,0.325) 8(1.5,0.975)
  rect 1.75x2.5 smd: 9(0,0)
  silkscreen extent -2.02,-1.5 1,1.78, body extent -1.55,-1.5 1.55,1.5, height 1
SOP65P600X115-15 [mm] "Pitch 0.65p with EP"
  rect 1.31x0.45 smd: 1(-2.85,1.95) 2(-2.85,1.3) 3(-2.85,0.65) 4(-2.85,0) 5(-2.85,-0.65) 6(-2.85,-1.3) 7(-2.85,-1.95) 8(2.85,-1.95) 9(2.85,-1.3) 10(2.85,-0.65) 11(2.85,0) 12(2.85,0.65) 13(2.85,1.3) 14(2.85,1.95)
  rect 2.65x4 smd: 15(0,0)
  silkscreen extent -3.6,-2.5 2,2.9, body extent -3,-2.45 3,2.45, height 1.15
"SOT65P210X100-3N - AC" [mm] "SOT323, 3-Leads, Body 2,00x2,10mm, Pitch 0,65mm, IPC Medium Density"
  rect 0.85x0.5 smd: 2(-1.075,-0.65) A(-1.075,0.65) C(1.075,0)
  silkscreen extent -1.65,-1.05 0.65,1.52, body extent -1.15,-1.05 1.15,1.05, height 0.9
SOT95P240X120-3N [mm] "SOT23, 3-Leads, Body 2,92x2,40mm, Pitch 0,95mm, IPC Medium Density"
  rect 0.95x0.7 smd: 1(-1.225,0.95) 2(-1.225,-0.95) 3(1.225,0)
  silkscreen extent -1.35,-1.55 0.75,1.97, body extent -1.35,-1.56 1.35,1.56, height 1.2
SOT95P280X145-5N [mm] "SOT23, 5-Leads, Body 3,13x2,80mm, Pitch 0,95mm, IPC Medium Density"
  rect 1.1x0.6 smd: 1(-1.3,0.95) 2(-1.3,0) 3(-1.3,-0.95) 4(1.3,-0.95) 5(1.3,0.95)
  silkscreen extent -1.5,-1.5 0.8,1.92, body extent -1.4,-1.45 1.4,1.45, height 1.45
SOT95P280X145-6N [mm]
  rect 1.2x0.55 smd: 1(-1.25,0.95) 2(-1.25,0) 3(-1.25,-0.95) 4(1.25,-0.95) 5(1.25,0) 6(1.25,0.95)
  silkscreen extent -2.3,-1.46 0.7,1.8, body extent -1.42,-1.46 1.42,1.46, height 1.1
STM-LQFP64_M [mm] "QFP, 64-Leads, Body 10x10mm, Pitch 0.5mm, IPC Low Density"
  rect 1.4x0.3 smd: 1(-5.7,3.75) 2(-5.7,3.25) 3(-5.7,2.75) 4(-5.7,2.25) 5(-5.7,1.75) 6(-5.7,1.25) 7(-5.7,0.75) 8(-5.7,0.25) 9(-5.7,-0.25) 10(-5.7,-0.75) 11(-5.7,-1.25) 12(-5.7,-1.75) 13(-5.7,-2.25) 14(-5.7,-2.75) 15(-5.7,-3.25) 16(-5.7,-3.75) 33(5.7,-3.75) 34(5.7,-3.25) 35(5.7,-2.75) 36(5.7,-2.25) 37(5.7,-1.75) 38(5.7,-1.25) 39(5.7,-0.75) 40(5.7,-0.25) 41(5.7,0.25) 42(5.7,0.75) 43(5.7,1.25) 44(5.7,1.75) 45(5.7,2.25) 46(5.7,2.75) 47(5.7,3.25) 48(5.7,3.75)
  rect 0.3x1.4 smd: 17(-3.75,-5.7) 18(-3.25,-5.7) 19(-2.75,-5.7) 20(-2.25,-5.7) 21(-1.75,-5.7) 22(-1.25,-5.7) 23(-0.75,-5.7) 24(-0.25,-5.7) 25(0.25,-5.7) 26(0.75,-5.7) 27(1.25,-5.7) 28(1.75,-5.7) 29(2.25,-5.7) 30(2.75,-5.7) 31(3.25,-5.7) 32(3.75,-5.7) 49(3.75,5.7) 50(3.25,5.7) 51(2.75,5.7) 52(2.25,5.7) 53(1.75,5.7) 54(1.25,5.7) 55(0.75,5.7) 56(0.25,5.7) 57(-0.25,5.7) 58(-0.75,5.7) 59(-1.25,5.7) 60(-1.75,5.7) 61(-2.25,5.7) 62(-2.75,5.7) 63(-3.25,5.7) 64(-3.75,5.7)
  silkscreen extent -5.82,-4.6 4.6,4.6, body extent -6,-6 6,6, height 1.62
SW_CJS-1200TA [mm]
  rect 1x1.6 smd: 1(-1.75,-1.15) 2(0,1.15) 3(1.75,-1.15)
  silkscreen extent -2.7,-2.46 2.7,1.25, body extent -2.7,-1.4 2.7,1.4, height 2.5
TP_c200 [mm] "TP SMD D.2mm"
  round 2 smd paste-5: 1(0,0)
  silkscreen extent -2,-2 2,2
WURTH-SBTW_3528#1 [mm] "SMD Bi-color TOP LED, body 3.2x2.8mm"
  rect 1.5x0.9 smd: A1(-1268.45,-1269.3) A2(-1268.45,-1270.7) C1(-1271.55,-1269.3) C2(-1271.55,-1270.7)
  silkscreen extent -1271.7,-1271.5 -1269.5,-1268.19, body extent -1271.75,-1271.4 -1268.25,-1268.6, height 1.9
WURTH-SBTW_3528#2 [mm] "SMD Bi-color TOP LED, body 3.2x2.8mm"
  rect 1.5x0.9 smd: A1(1.55,0.7) A2(1.55,-0.7) C1(-1.55,0.7) C2(-1.55,-0.7)
  silkscreen extent -1.7,-1.5 0.5,1.81, body extent -1.75,-1.4 1.75,1.4, height 1.9
WURTH_74651195 [mm] "Shank, THR, 9 pins, 10x10mm, M5, thread 7mm"
  round 3.2 hole 1.85: 1(-4.435,-4.435) 1(-4.435,0) 1(-4.435,4.435) 1(0,-4.435) 1(0,0) 1(0,4.435) 1(4.435,-4.435) 1(4.435,0) 1(4.435,4.435)
  body extent -5,-5 5,5, height 10.5

## Part data
C1: Case=1206, Manufacturer=KEMET, PartNumber=C1206C225K5RAC, Voltage=50V, SMD/PTH=SMD
C2: Case=0606, Manufacturer=KEMET, PartNumber=C0603C104K5RACTU, Voltage=50V, SMD/PTH=SMD
C3 C4 C5 C6 C9 C11 C13 C15: Case=1206, Manufacturer=KEMET, PartNumber=GCJ31CR71A106MA13L, Voltage=10V, SMD/PTH=SMD
C7 C8 C18 C63 C64: Case=0603, Manufacturer=KEMET, PartNumber=C0603C105K8RACTU, Voltage=10V, SMD/PTH=SMD
C10 C12 C14 C16 C17 C21 C23 C24 C25 C27 C28 C31 C32 C38 C42 C46 C51 C52 C55 C56 C61 C62 C66 C71: Case=0603, Manufacturer=KEMET, PartNumber=C0603C104K5RACTU, Voltage=10V, SMD/PTH=SMD
C19 C20: Case=0603, Manufacturer=Murata, PartNumber=GCM1885C2A270FA16D, Voltage=100V, SMD/PTH=SMD
C22: Case=0805, Manufacturer=KEMET, PartNumber=C1206C475K5RACTU, Voltage=50V, SMD/PTH=SMD
C26: Case=0603, Manufacturer=KEMET, PartNumber=C0603X473K5RAC3316, Voltage=50V, SMD/PTH=SMD
C29 C30 C33 C35 C37 C39 C41 C43 C45 C47 C65 C69 C70 C74: Case=0603, Voltage=Voltage
C34 C36 C40 C44 C48 C67 C68 C72 C73: Case=1206, Voltage=Voltage
C49 C50 C53 C54: Case=0603
C57 C58 C59 C60: Case=0603, Manufacturer=KEMET, PartNumber=C0603C103K1RACTU, Voltage=100V, SMD/PTH=SMD
D1 D15 D16: Case=SOD123, Manufacturer=Nexperia, PartNumber=PMEG4010EGWX
D2: library part Diode_TVS_Bid, Case=SMB-2, Manufacturer=Littelfuse, PartNumber=SZ1SMB20CAT3G, Voltage=20V, SMD/PTH=SMD
D4 D14: library part SM712-02HTG, "ESD Diode bid", Case=SOT23-3, Manufacturer=Littelfuse, PartNumber=SM712-02HTG, SMD/PTH=SMD
D10 D11: library part SP0504BAHTG, Manufacturer=Littelfuse
DL1 DL2: library part LED_Green, Case=0603, Manufacturer="Wurth Elektronik", PartNumber=150060VS75000, SMD/PTH=SMD
DL3 DL15 DL16 DL17 DL18: library part LED_Blue, Case=0603, Manufacturer="Wurth Elektronik", PartNumber=150060BS75000, SMD/PTH=SMD
DL5 DL19: "Led Yellow - Blue 3528", Case=3528, Manufacturer=Wurth, PartNumber=150141YB73100
DL6 DL7 DL8 DL9 DL10 DL11 DL12 DL13 DL14: "Led Red - Green 3528", Case=3528, Manufacturer=Wurth, PartNumber=150141RV73100
J1: library part FTSH-105-X-X-DV-007-P-X
J2: library part MOLEX_477450100, "Connector Header Board Edge, Through Hole, Right Angle 28 position", Manufacturer=Molex, PartNumber=0477450100
J3: "USB Connectors USB Type C,2.0, Rec,SMT, 0.95mmTH Shell Stakes,G/F,RA,Top Mnt,T&R", Manufacturer=GCT, PartNumber=USB4105-GF-A
L1: Manufacturer=BOURNS, PartNumber=SDE0805A-180M
L3 L4: Case=0603, Manufacturer=Murata, PartNumber=BLM18HB331SN1D, SMD/PTH=SMD
MP1 MP2: library part 74651195R, Manufacturer="Wurth Electronics", PartNumber=74651195R
R1: library part Resistor, Case=0603, Manufacturer=Vishay, PartNumber=CRCW060388K7FKEAC, SMD/PTH=SMD
R2 R77 R78 R95 R96 R97 R98 R99 R100 R101 R102 R103 R104 R105 R106 R107 R108 R109 R110 R111 R112 R124 R125: library part Resistor, Case=0603, Manufacturer=Vishay, PartNumber=RC0603FR-071K3L, SMD/PTH=SMD
R3 R7 R12 R43 R44 R53 R54 R55 R56 R65 R66 R73 R74 R126: library part Resistor, Case=0603, Manufacturer=Vishay, PartNumber=CRCW060310K0FKEA
  R3 R7 R12 R126: SMD/PTH=SMD
R4: library part Resistor, Case=0603, Manufacturer=Vishay, PartNumber=CRCW060322K1FKEA, SMD/PTH=SMD
R5 R6 R76 R113 R114 R115 R116: library part Resistor, Case=0603, Manufacturer=Vishay, PartNumber=RC0603FR-07560RL, SMD/PTH=SMD
R8: library part Resistor, Case=0603, Manufacturer=Vishay, PartNumber=CRCW060351K0FKEA, SMD/PTH=SMD
R9: library part Resistor, Case=0603, Manufacturer=Vishay, PartNumber=CRCW06037K50FKEA, SMD/PTH=SMD
R10: library part Resistor, Case=0603, Manufacturer=Vishay, PartNumber=CRCW0603120RFKEA, SMD/PTH=SMD
R11: library part Resistor, Case=0603
R13 R14 R25 R31 R37 R79 R87: library part Resistor, Case=1206
R15 R16 R17 R18 R19 R20 R21 R22 R26 R27 R28 R29 R32 R33 R34 R35 R38 R39 R40 R41 R67 R68 R69 R70 R71 R72 R80 R81 R82 R83 R84 R85 R88 R89 R90 R91 R92 R93: library part Resistor, Case=0603, Manufacturer=Vishay, PartNumber=CRCW06034K70FKEB
  R15 R16 R26 R32 R38 R67 R68 R69 R70 R71 R72 R80 R88: SMD/PTH=SMD
R23 R24 R30 R36 R42 R86 R94 R117 R118: library part Resistor, Case=0603, Manufacturer=Vishay
  R117 R118: PartNumber=CRCW06030000Z0EAC, SMD/PTH=SMD
R45 R46 R49 R50 R57 R58 R61 R62 R75: library part Resistor, Case=0603, Manufacturer=Vishay, PartNumber=CRCW06030000Z0EAC
R47 R48 R51 R52 R59 R60 R63 R64: library part Resistor, Case=0603, Manufacturer=Vishay, PartNumber=CRCW060315K0FKEC
R119: library part Resistor, "Resistor", Case=0603, Manufacturer=Vishay, Part Number=CRCW06031K50FKEA
R120 R121: Case=0603, Manufacturer=Vishay, Part Number=CRCW06035K10FKEC
R122: library part Resistor, "Resistor", Case=0603, Manufacturer=Vishay, Part Number=CRCW060362K0FKEA
R123: library part Resistor, "Resistor", Case=0603, Manufacturer=Vishay, Part Number=CRCW0603120KFKEA
SW1: library part SWITCH_SPDT, Manufacturer="Nidec Components", PartNumber=CJS-1200TA
TP1 TP2 TP3 TP4 TP5 TP6 TP7 TP8 TP9 TP10 TP11 TP12 TP13 TP14 TP15 TP16 TP17 TP18 TP19: library part Test_Point
TP20 TP21 TP22 TP23: "Test Poin"
U1: library part LV3842XDBVR, "4-V to 36-V, 600-mA synchronous step-down converter", Case=6-SOT-23, Manufacturer="Texas Instruments", PartNumber=LV3842XDBVR
U2: "LDO Voltage Regulators 500-mA high-PSRR low-IQ low-dropout voltage regulator with enable", Case=SOT-23-5, Manufacturer="Texas Instruments", PartNumber=TLV75530PDBVR
U3: "IC MCU 32BIT 512KB FLASH 64LQFP", Manufacturer=ST
U4: library part TJA1051TK/3, "CAN HIGH-SPEED CAN TRANSCEIVER 3.3V / 5V Pin VIO", Case=HVSON-8, Manufacturer="NXP Semiconductors", PartNumber=TJA1051TK/3,118, SMD/PTH=SMD
U5 U6 U7: "Smart High-Side Power Switch 21A", Case=TSDSO-14, Manufacturer="Infineon Technologies", PartNumber=BTS70021EPPXUMA1
U8 U9: "Smart High-Side Power Switch 15A", Case=TSDSO-14, Manufacturer="Infineon Technologies", PartNumber=BTS70041EPZXUMA1
U10 U11 U12 U13: "Amp. op. One-channel, 1-MHz rail-to-rail input and output 1.8-V to 5.5-V operational amplifier 5-SOT-23 -40 to 125", Case=SOT23-5, Manufacturer="Texas Instrument", PartNumber=TLV9001IDBVR, SMD/PTH=SMD
U14: "F-RAM 4kbit FRAM, I2C, 3.0V 5.5V - SOP8 T&R", Manufacturer="Fujitsu Semiconductor", PartNumber=MB85RC04VPNF-G-JNERE1
U15: "IC EXPANDER 24B 32HUQFN", Case=HUQFN-32, Manufacturer="NXP Semiconductors", PartNumber=PCAL6524HEAZ
U16: "+ / - 0.5 degC Maximum Accuracy Digital Temperature Sensor, 400 uA, 2.7 to 5.5 V, -40 to 125 degC, 8-pin MSOP (MS8), Tube", Manufacturer=Microchip, PartNumber=MCP9808-E/MS
U17: "Smart High-Side Power Switch 7.5A", Case=TSDSO-14, Manufacturer="Infineon Technologies", PartNumber=BTS70082EPZXUMA1
U18: "Smart High-Side Power Switch 3A", Case=TSDSO-14, Manufacturer="Infineon Technologies", PartNumber=BTS70802EPAXUMA1
X1: library part Crystal, Manufacturer=Abracom, PartNumber=ABM8AIG-8.000MHZ-1Z-T

## Free pads (board coordinates)
  round 10 hole 5 unplated: MH(-40,-45) MH(-40,45) MH(40,-44.898) MH(40,45)

## Nets (pads, with @x,y where several pads share a name; then routed paths per layer and width w, separated by ;. In a path a pad name is that pad's centre, name@x,y a point inside that pad or via, vN(x,y) a via of type N, cw(c..) or ccw(c..) an arc to the next point about the centre after c; other vN are vias at no path point)
3V3: C8.1 C27.1 C28.2 C61.1 C62.1 C64.1 R5.2 R11.2 R45.2 R46.2 R57.2 R58.2 R71.2 R72.2 R73.2 R74.2 R76.2 U2.5 U4.5 U14.8 U15.31 U16.8
5V: C3.1 C4.1 C5.1 C6.1 C7.1 C25.1 C26.1 C28.1 C51.1 C52.1 C55.1 C56.1 C63.1 D15.C D16.C R2.2 U2.1 U2.3 U4.3 U10.5 U11.5 U12.5 U13.5 U15.27
+3V3: C9.1 C10.1 C11.1 C12.1 C13.1 C14.1 C15.1 C16.1 C23.1 J1.1 L2.1 SW1.1 U3.1 U3.19 U3.32 U3.48 U3.64
+12V: C29.1 C30.1 C31.1 C32.1 C37.1 C38.1 C41.1 C42.1 C45.1 C46.1 C65.1 C66.1 C70.1 C71.1 D1.A D2.2 MP1.1 MP2.1 R8.2 R15.2 R16.2 R26.2 R32.2 R38.2 R80.2 R88.2 U5.15 U6.15 U7.15 U8.15 U9.15 U17.15 U18.15
CAN0_IC_N: L4.1 R10.1 U4.6
CAN0_IC_P: L3.1 R10.2 U4.7
CAN_N: D4.1 J2.19 L4.2 TP7.1
CAN_P: D4.2 J2.20 L3.2 TP6.1
D1_IN: D11.1 R67.1
D2_IN: D11.3 R69.1
D3_IN: D11.5 R68.1
D4_IN: D11.4 R70.1
GND: C1.2 C3.2 C4.2 C5.2 C6.2 C7.2 C8.2 C9.2 C10.2 C11.2 C12.2 C13.2 C14.2 C15.2 C16.2 C17.2 C18.2 C19.2 C20.2 C21.2 C22.2 C23.2 C24.2 C25.2 C26.2 C27.2 C31.2 C32.2 C34.2 C36.2 C38.2 C40.2 C42.2 C44.2 C46.2 C48.2 C49.2 C50.2 C51.2 C52.2 C53.2 C54.2 C55.2 C56.2 C57.2 C58.2 C59.2 C60.2 C61.2 C62.2 C63.2 C64.2 C66.2 C67.2 C68.2 C71.2 C72.2 C73.2 D2.1 D3.A D4.3 D10.2 D11.2 D14.3 DL1.C DL2.C DL3.C DL5.C1 DL5.C2 DL6.C1 DL6.C2 DL7.C1 DL7.C2 DL8.C1 DL8.C2 DL9.C1 DL9.C2 DL10.C1 DL10.C2 DL11.C1 DL11.C2 DL12.C1 DL12.C2 DL13.C1 DL13.C2 DL14.C1 DL14.C2 DL15.C DL16.C DL17.C DL18.C DL19.C1 DL19.C2 J1.3 J1.5 J2.24 J3.1 J3.2 J3.3 J3.4 J3.A1-B12 J3.B1-A12 R3.1 R4.1 R9.1 R12.1 R13.2 R14.2 R25.2 R31.2 R37.2 R47.2 R48.2 R53.1 R54.1 R59.2 R60.2 R65.1 R66.1 R75.2 R79.2 R87.2 R120.1 R121.1 R123.1 SW1.3 U1.2 U2.2 U3.12 U3.18 U3.31 U3.47 U3.63 U4.2 U4.9 U10.2 U11.2 U12.2 U13.2 U14.2 U14.3 U14.4 U14.7 U15.25 U15.33 U16.4 U16.5 U16.6 U16.7 X1.2 X1.4
I2C_SCL: R72.1 TP14.1 U3.58 U14.6 U15.29 U16.2
I2C_SDA: R71.1 TP13.1 U3.59 U14.5 U15.30 U16.1
IGNITION: R126.1
LD_STATUS: R6.2 U3.54
MCU_BATT_REF: C24.1 D3.C R8.1 R9.2 U3.17
MCU_BOOT0: R7.2 TP1.1 U3.60
MCU_CAN_RX: U3.61 U4.4
MCU_CAN_TX: R11.1 U3.62 U4.1
MCU_DIG1: C57.1 R67.2
MCU_DIG2: C59.1 R69.2
MCU_DIG3: C58.1 R68.2
MCU_DIG4: C60.1 R70.2
MCU_DSEL_L1_2: R81.1 U3.36
MCU_DSEL_L3_4: R89.1 U3.41
MCU_IN_H1: R17.1 U3.26
MCU_IN_H2: R27.1 U3.27
MCU_IN_H3: R18.1 U3.28
MCU_IN_L1: R82.1 U3.37
MCU_IN_L2: R83.1 U3.38
MCU_IN_L3: R90.1 U3.39
MCU_IN_L4: R91.1 U3.40
MCU_IN_M1: R33.1 U3.29
MCU_IN_M2: R39.1 U3.35
MCU_IS_H1: C33.1 R19.1 U3.14
MCU_IS_H2: C39.1 R28.1 U3.15
MCU_IS_H3: C35.1 R21.1 U3.16
MCU_IS_L1_2: C69.1 R84.1 U3.22
MCU_IS_L3_4: C74.1 R92.1 U3.23
MCU_IS_M1: C43.1 R34.1 U3.20
MCU_IS_M2: C47.1 R40.1 U3.21
MCU_OSC_IN: C19.1 U3.5 X1.1
MCU_OSC_OUT: C20.1 U3.6 X1.3
MCU_RST: C21.1 J1.10 TP5.1 U3.7
MCU_SENS1: C49.1 R45.1 R49.2 U3.8
MCU_SENS2: C53.1 R57.1 R61.2 U3.9
MCU_SENS3: C54.1 R58.1 R62.2 U3.10
MCU_SENS4: C50.1 R46.1 R50.2 U3.11
MCU_SWCLK: J1.4 TP3.1 U3.49
MCU_SWDIO: J1.2 TP2.1 U3.46
MCU_SWO: J1.6 TP4.1 U3.55
MCU_USB_VBUS: R119.2 R122.1 R123.2 U3.42
MCU_USBD_N: D14.1 R118.1 U3.44
MCU_USBD_P: D14.2 R117.1 R119.1 U3.45
NetC1_1: C1.1 D1.C U1.5
NetC2_1: C2.1 U1.1
NetC2_2: C2.2 L1.1 U1.6
NetC22_1: C22.1 U3.30
NetC29_2: C29.2 R13.1 U5.1
NetC30_2: C30.2 R14.1 U6.1
NetC33_2: C33.2 D5.A R23.1
NetC35_2: C35.2 D6.A R24.1
NetC37_2: C37.2 R25.1 U7.1
NetC39_2: C39.2 D7.A R30.1
NetC41_2: C41.2 R31.1 U8.1
NetC43_2: C43.2 D8.A R36.1
NetC45_2: C45.2 R37.1 U9.1
NetC47_2: C47.2 D9.A R42.1
NetC65_2: C65.2 R79.1 U17.1
NetC69_2: C69.2 D12.A R86.1
NetC70_2: C70.2 R87.1 U18.1
NetC74_2: C74.2 D13.A R94.1
NetD5_C: D5.C R19.2 R20.1
NetD6_C: D6.C R21.2 R22.1
NetD7_C: D7.C R28.2 R29.1
NetD8_C: D8.C R34.2 R35.1
NetD9_C: D9.C R40.2 R41.1
NetD12_C: D12.C R84.2 R85.1
NetD13_C: D13.C R92.2 R93.1
NetD15_A: D15.A L1.2 R1.2
NetDL1_A: DL1.A R2.1
NetDL2_A: DL2.A R5.1
NetDL3_A: DL3.A R6.1
NetDL4_A: DL4.A R76.1
NetDL4_C: DL4.C TP17.1 U16.3
NetDL5_A1: DL5.A1 R78.1
NetDL5_A2: DL5.A2 R77.1
NetDL6_A1: DL6.A1 R96.1
NetDL6_A2: DL6.A2 R95.1
NetDL7_A1: DL7.A1 R98.1
NetDL7_A2: DL7.A2 R97.1
NetDL8_A1: DL8.A1 R100.1
NetDL8_A2: DL8.A2 R99.1
NetDL9_A1: DL9.A1 R102.1
NetDL9_A2: DL9.A2 R101.1
NetDL10_A1: DL10.A1 R104.1
NetDL10_A2: DL10.A2 R103.1
NetDL11_A1: DL11.A1 R106.1
NetDL11_A2: DL11.A2 R105.1
NetDL12_A1: DL12.A1 R108.1
NetDL12_A2: DL12.A2 R107.1
NetDL13_A1: DL13.A1 R110.1
NetDL13_A2: DL13.A2 R109.1
NetDL14_A1: DL14.A1 R112.1
NetDL14_A2: DL14.A2 R111.1
NetDL15_A: DL15.A R113.1
NetDL16_A: DL16.A R114.1
NetDL17_A: DL17.A R115.1
NetDL18_A: DL18.A R116.1
NetDL19_A1: DL19.A1 R125.1
NetDL19_A2: DL19.A2 R124.1
NetJ3_A5: J3.A5 R120.2 TP22.1
NetJ3_A6: J3.A6 J3.B6 R117.2
NetJ3_A7: J3.A7 J3.B7 R118.2
NetJ3_A8: J3.A8 TP21.1
NetJ3_B5: J3.B5 R121.2 TP23.1
NetJ3_B8: J3.B8 TP20.1
NetR1_1: R1.1 R4.2 U1.3
NetR3_2: R3.2 R126.2 U1.4
NetR7_1: R7.1 SW1.2
NetR12_2: R12.2 U4.8
NetR15_1: R15.1 TP8.1 U5.3
NetR16_1: R16.1 TP9.1 U6.3
NetR17_2: R17.2 U5.2
NetR18_2: R18.2 U6.2
NetR20_2: R20.2 R23.2 U5.4
NetR22_2: R22.2 R24.2 U6.4
NetR26_1: R26.1 TP10.1 U7.3
NetR27_2: R27.2 U7.2
NetR29_2: R29.2 R30.2 U7.4
NetR32_1: R32.1 TP11.1 U8.3
NetR33_2: R33.2 U8.2
NetR35_2: R35.2 R36.2 U8.4
NetR38_1: R38.1 TP12.1 U9.3
NetR39_2: R39.2 U9.2
NetR41_2: R41.2 R42.2 U9.4
NetR43_1: R43.1 R49.1 U10.1
NetR43_2: R43.2 R47.1 U10.4
NetR44_1: R44.1 R50.1 U11.1
NetR44_2: R44.2 R48.1 U11.4
NetR51_2: R51.2 R53.2 U10.3
NetR52_2: R52.2 R54.2 U11.3
NetR55_1: R55.1 R61.1 U12.1
NetR55_2: R55.2 R59.1 U12.4
NetR56_1: R56.1 R62.1 U13.1
NetR56_2: R56.2 R60.1 U13.4
NetR63_2: R63.2 R65.2 U12.3
NetR64_2: R64.2 R66.2 U13.3
NetR73_1: R73.1 TP16.1 U15.32
NetR74_1: R74.1 TP15.1 U15.28
NetR75_1: R75.1 U15.26
NetR77_2: R77.2 U15.24
NetR78_2: R78.2 U15.23
NetR80_1: R80.1 TP18.1 U17.3
NetR81_2: R81.2 U17.5
NetR82_2: R82.2 U17.2
NetR83_2: R83.2 U17.6
NetR85_2: R85.2 R86.2 U17.4
NetR88_1: R88.1 TP19.1 U18.3
NetR89_2: R89.2 U18.5
NetR90_2: R90.2 U18.2
NetR91_2: R91.2 U18.6
NetR93_2: R93.2 R94.2 U18.4
OUT_H1: C34.1 J2.1 U5.8 U5.9 U5.10 U5.11 U5.12 U5.13 U5.14
OUT_H2: C40.1 J2.2 U7.8 U7.9 U7.10 U7.11 U7.12 U7.13 U7.14
OUT_H3: C36.1 J2.3 U6.8 U6.9 U6.10 U6.11 U6.12 U6.13 U6.14
OUT_L1: C67.1 J2.26 U17.12 U17.13 U17.14
OUT_L2: C68.1 J2.25 U17.8 U17.9 U17.10
OUT_L3: C72.1 J2.27 U18.12 U18.13 U18.14
OUT_L4: C73.1 J2.28 U18.8 U18.9 U18.10
OUT_M1: C44.1 J2.4 U8.8 U8.9 U8.10 U8.11 U8.12 U8.13 U8.14
OUT_M2: C48.1 J2.5 U9.8 U9.9 U9.10 U9.11 U9.12 U9.13 U9.14
S1_IN: D10.1 R51.1
S2_IN: D10.3 R63.1
S3_IN: D10.5 R64.1
S4_IN: D10.4 R52.1
STATUS_CAN_RX: R124.2 U3.53
STATUS_CAN_TX: R125.2 U3.2
STATUS_IN_D1: R113.2 U15.19
STATUS_IN_D2: R114.2 U15.20
STATUS_IN_D3: R115.2 U15.21
STATUS_IN_D4: R116.2 U15.22
STATUS_OUT_H1_ERR: R96.2 U15.1
STATUS_OUT_H1_OK: R95.2 U15.2
STATUS_OUT_H2_ERR: R98.2 U15.3
STATUS_OUT_H2_OK: R97.2 U15.4
STATUS_OUT_H3_ERR: R100.2 U15.5
STATUS_OUT_H3_OK: R99.2 U15.6
STATUS_OUT_L1_ERR: R106.2 U15.11
STATUS_OUT_L1_OK: R105.2 U15.12
STATUS_OUT_L2_ERR: R108.2 U15.13
STATUS_OUT_L2_OK: R107.2 U15.14
STATUS_OUT_L3_ERR: R110.2 U15.15
STATUS_OUT_L3_OK: R109.2 U15.16
STATUS_OUT_L4_ERR: R112.2 U15.17
STATUS_OUT_L4_OK: R111.2 U15.18
STATUS_OUT_M1_ERR: R102.2 U15.7
STATUS_OUT_M1_OK: R101.2 U15.8
STATUS_OUT_M2_ERR: R104.2 U15.9
STATUS_OUT_M2_OK: R103.2 U15.10
VBUS: D16.A J3.A4-B9 J3.B4-A9 R122.2
VDDA: C17.1 C18.1 L2.2 U3.13
pads on no net: D3.2 D5.2 D6.2 D7.2 D8.2 D9.2 D12.2 D13.2 J1.8 J1.9 J2. J2.6 J2.7 J2.8 J2.9 J2.10 J2.11 J2.12 J2.13 J2.14 J2.15 J2.16 J2.17 J2.18 J2.21 J2.22 J2.23 J3. U2.4 U3.3 U3.4 U3.24 U3.25 U3.33 U3.34 U3.43 U3.50 U3.51 U3.52 U3.56 U3.57 U5.5 U5.6 U5.7 U6.5 U6.6 U6.7 U7.5 U7.6 U7.7 U8.5 U8.6 U8.7 U9.5 U9.6 U9.7 U14.1 U17.7 U17.11 U18.7 U18.11

## Polygon pours and split planes (outlines as drawn)
OUT_M2 on Top Layer "OUT_M2_L01_P006" (solid, pour order 6): 10.254,-24.746 12,-23 18,-23 18,-39 10.254,-39
OUT_M1 on Top Layer "OUT_M1_L01_P005" (solid, pour order 5): 9.627,-28.877 8.5,-27.75 8.5,-23.127 1.75,-23.127 1.75,-32.25 3.377,-33.877 3.377,-39.127 9.627,-39.127
OUT_H1 on Top Layer "OUT_H1_L01_P001" (solid, pour order 1): -29.75,-23 -30,-23.25 -30,-32.25 -27,-35.25 -23,-39.25 -10.75,-39.25 -10.5,-39 -10.5,-35.75 -13,-33.25 -18.25,-33.25 -22,-29.5 -22,-23 -22.75,-23
OUT_H3 on Top Layer "OUT_H3_L01_P004" (solid, pour order 4): 2.75,-33.75 -2,-29 -2,-23 -7.75,-23 -7.75,-31.25 -3.5,-35.5 -3.5,-39 2.75,-39
no net on Top Layer "NONET_L01_P002" (solid, pour order 2): -4,-35.5 -4,-39 -10.5,-39 -10.5,-35.75 -13.5,-32.75 -16.25,-32.75 -18.25,-30.75 -18.25,-23 -12.25,-23 -12.25,-27.25
+12V on Top Layer "+12V_L01_P000" (solid, pour order 0): -30,0 -30,-18.75 -29.25,-19.5 29.25,-19.5 30,-18.75 30,-2.5 31.25,-1.25 37.5,-1.25 37.5,-23 -34.75,-23 -34.75,0

## Other copper
Top Layer:
  text "CAN" at -38.4,-27.4 h2

## Silkscreen, mask and mechanical layers (free items; w line width, h text height)
Top Assembly:
  lines w0.2: 0,0 0,0

## Text inside footprints (layer, text, board x,y; h text height)
J2: Top Assembly "EDGE PCB" at -7.3,-49.85 h2